# Altium PCB Sheet1.PcbDoc
Units mm, origin at the board's own origin, x right, y up, seen from the top; angles counter-clockwise.
Board outline 152.4 x 101.6 mm, 2 copper layers (Top Layer, Bottom Layer); 12 components, 9 nets, 61 pads, 0 vias.
Unrouted connection lines stored in the file: 2.
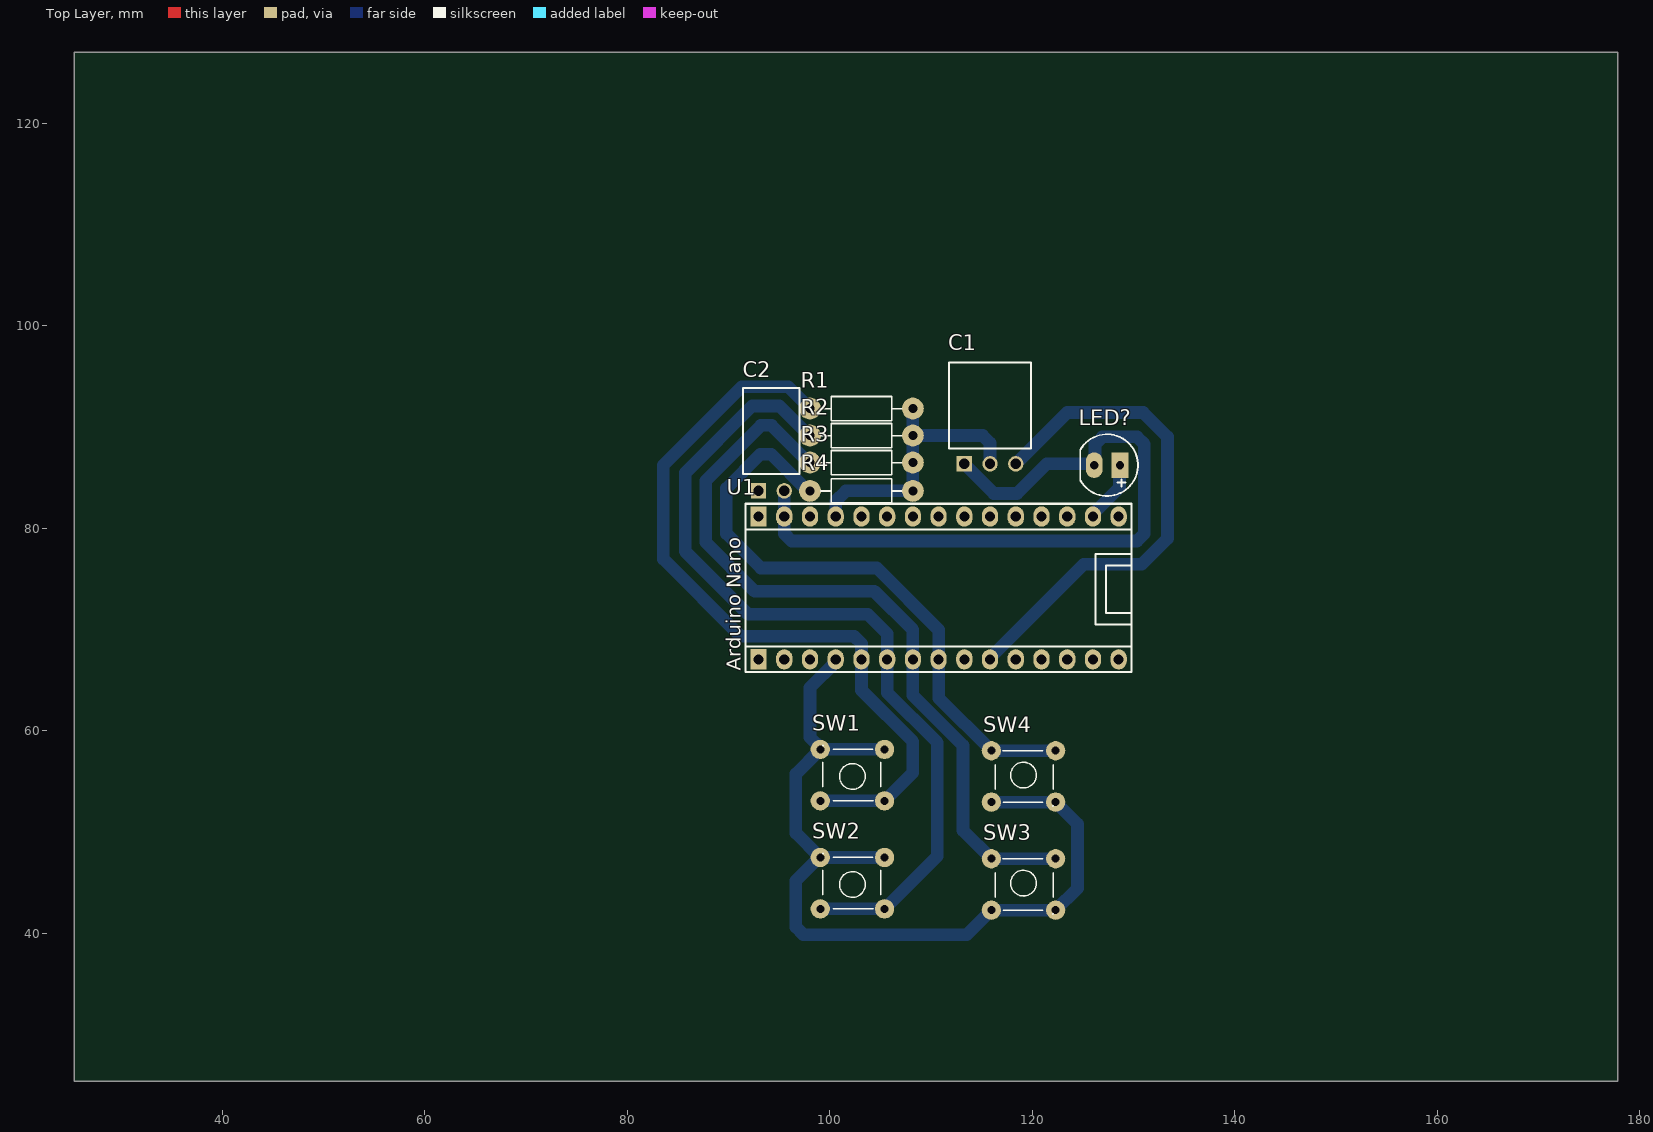
[diagram p0: Top Layer view]
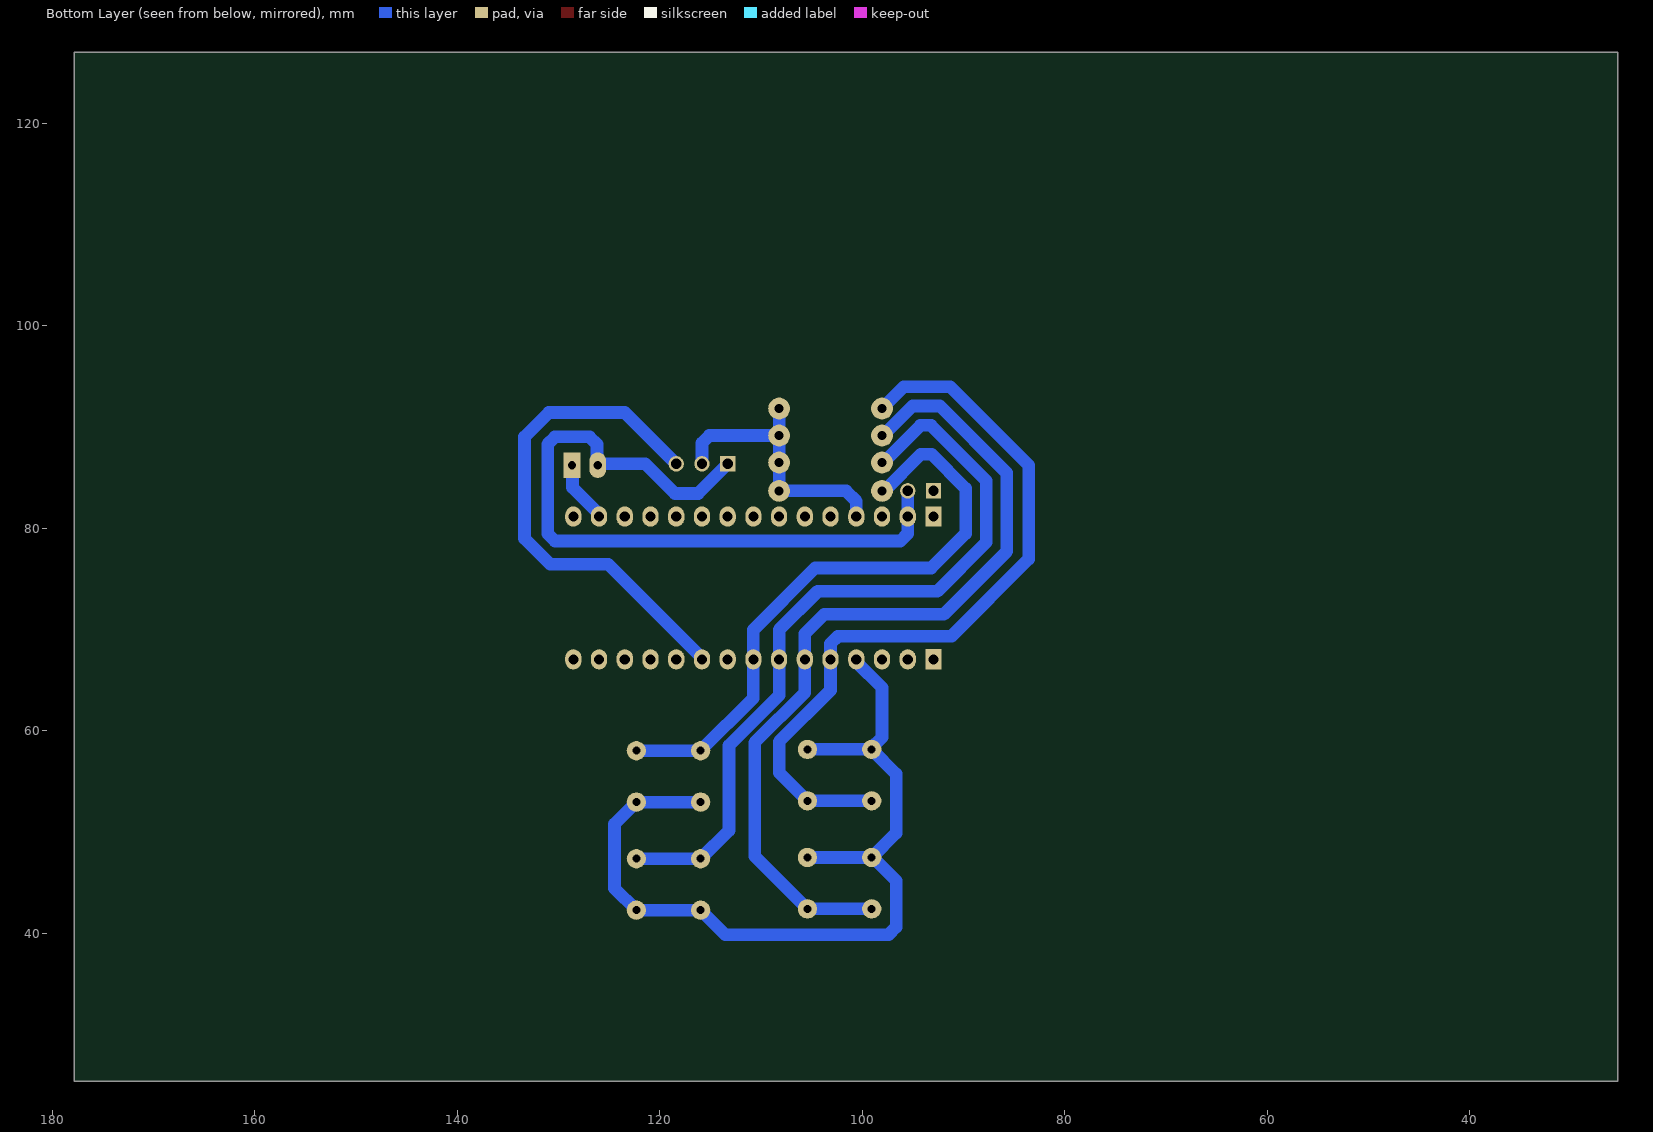
[diagram p1: Bottom Layer view, seen from below]
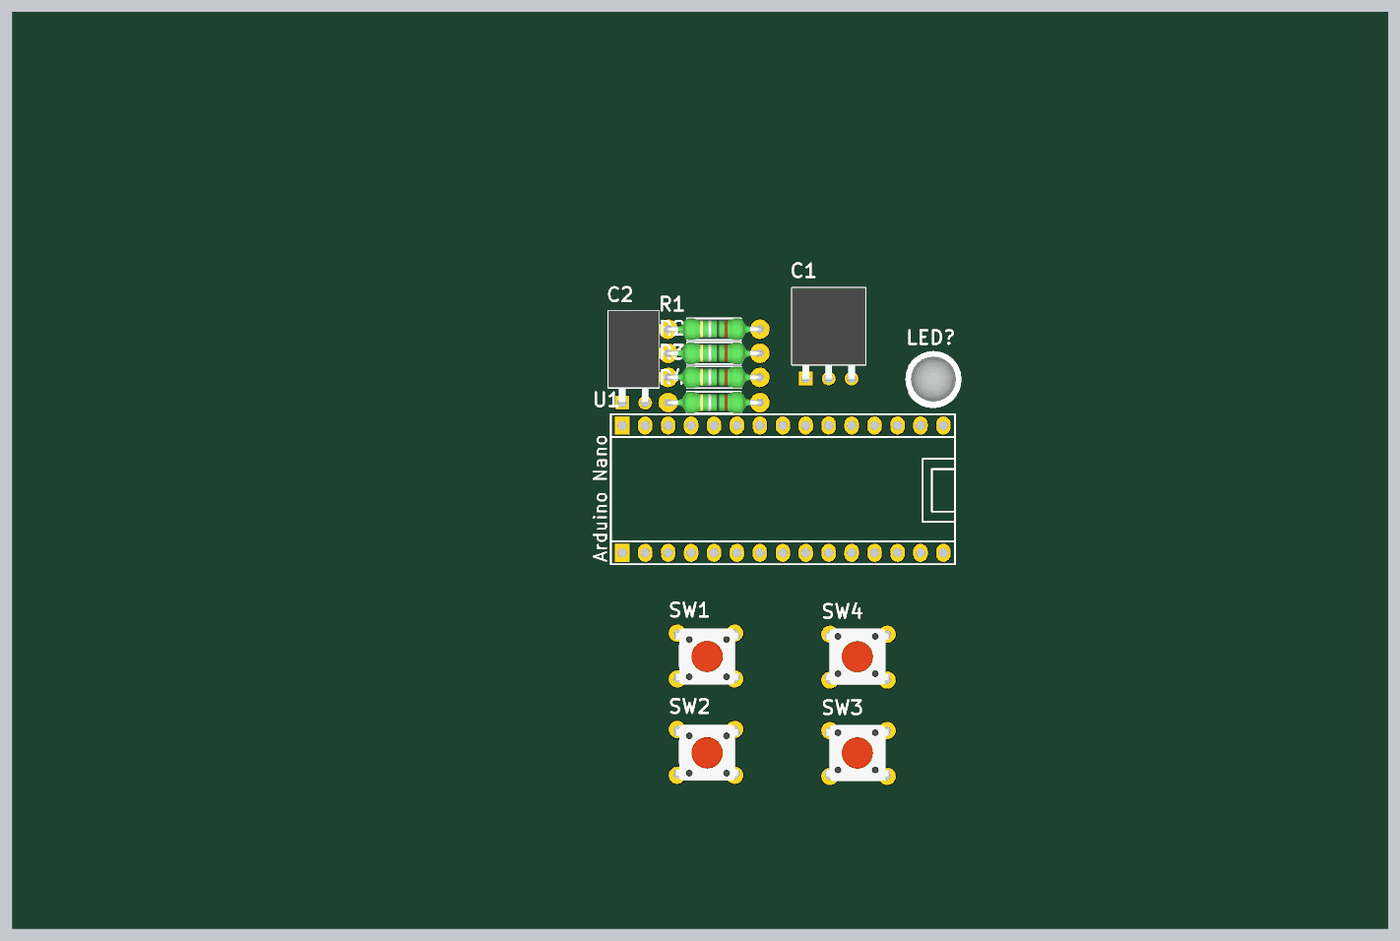
[diagram p2: 3D render of the assembled board from above, using the file's embedded part models]

## Layer stack, top to bottom
Top Solder: solder mask 0.0102, Solder Resist, Dk 3.5
Top Layer: signal copper 0.0356
Dielectric 1: dielectric 0.32, FR-4, Dk 4.8
Bottom Layer: signal copper 0.0356
Bottom Solder: solder mask 0.0102, Solder Resist, Dk 3.5

## Board outline
25.4,25.4 177.8,25.4 177.8,127 25.4,127

## Design rules (kind name [scope] priority, off if disabled: settings)
Clearance [All] p1: gap=0.254 ignorepadtopadclearanceinfootprint=FALSE except(0: Arc-Hole Track-Hole SMDPad-Hole THPad-Hole Via-Hole Fill-Hole Poly-Hole Region-Hole Text-Hole)
PolygonConnect [All] p1: connectstyle=Relief reliefconductorwidth=0.254 reliefentries=4 polygonreliefangle="90 Angle" airgapwidth=0.254
RoutingLayers [All] p1: top layer_v5=FALSE bottom layer_v5=TRUE
RoutingVias [All] p1: holewidth=0.5 width=1.25 viastyle="Through Hole" minholewidth=0.5 minwidth=1.25 maxholewidth=0.5 maxwidth=1.25
SolderMaskExpansion [All] p1: expansion=0.102 istentingtop=FALSE
Width [All] p1: maxlimit=1.75 minlimit=1 preferedwidth=1.25
29 further rules are at their usual default settings.

## Components (designator, comment, footprint, x,y, rotation, side; value= is the part's Value field where it differs from the comment)
C1 "RF 315MHz" JP3-C1C 115.824,86.36 r0 top
C2 "Battery" JP2-C1C 92.964,83.693 r0 top
LED? "LED" LED-5-WHITE 127.381,86.233 r180 top value="LED 3 ly Single Colour"
R1 "2k2" RES-1/4W 103.505,91.694 r0 top
R2 "2k2" RES-1/4W 103.505,89.027 r0 top
R3 "2k2" RES-1/4W 103.505,86.36 r0 top
R4 "2k2" RES-1/4W 103.505,83.566 r0 top
SW1 "SW" SW2-DIP 105.41,53.086 r180 top value="Button chip 4 pin"
SW2 "SW" SW2-DIP 105.41,42.418 r180 top value="Button chip 4 pin"
SW3 "SW" SW2-DIP 115.951,47.371 r0 top value="Button chip 4 pin"
SW4 "SW" SW2-DIP 115.951,58.039 r0 top value="Button chip 4 pin"
U1 "Arduino Nano" PCBComponent_1 111.76,73.914 r180 top

## Footprints (in the part's own frame and the unit in brackets; to place one, negate y for a bottom-side part, rotate by r counter-clockwise, add the part's x,y. Pads: shape width x height; smd on the part's side, far side on the other; paste and mask are expansions set on the pad)
JP2-C1C [mm] "02p 1 row Right angle"
  rect 1.52x1.52 hole 1.02: 1(0,0)
  round 1.52 hole 1.02: 2(2.54,0)
  silkscreen extent -1.52,1.65 4.06,10.17, body extent -1.52,-0.13 4.06,10.17, height 2.51
JP3-C1C [mm] "03p 1 row Right angle"
  rect 1.52x1.52 hole 1.02: 1(-2.54,0)
  round 1.52 hole 1.02: 2(0,0) 3(2.54,0)
  silkscreen extent -4.06,1.52 4.06,10.03, body extent -4.06,-0.25 4.06,10.05, height 2.51
LED-5-WHITE [mil] "LED 2 PIN, 5 ly , Only colour, pin to pin 110mil"
  rect 65x100 hole 32: 1(-50,0)
  oval 65x100 hole 32: 2(50,0)
  silkscreen extent -120,-120 104,120, body extent -124,-125 121,120, height 340
PCBComponent_1 [mm]
  rect 1.6x2 hole 1: 1(18.796,6.858) 30(18.796,-7.239)
  oval 1.6x2 hole 1: 2(16.256,6.858) 3(13.716,6.858) 4(11.176,6.858) 5(8.636,6.858) 6(6.096,6.858) 7(3.556,6.858) 8(1.016,6.858) 9(-1.524,6.858) 10(-4.064,6.858) 11(-6.604,6.858) 12(-9.144,6.858) 13(-11.684,6.858) 14(-14.224,6.858) 15(-16.764,6.858) 16(-16.764,-7.239) 17(-14.224,-7.239) 18(-11.684,-7.239) 19(-9.144,-7.239) 20(-6.604,-7.239) 21(-4.064,-7.239) 22(-1.524,-7.239) 23(1.016,-7.239) 24(3.556,-7.239) 25(6.096,-7.239) 26(8.636,-7.239) 27(11.176,-7.239) 28(13.716,-7.239) 29(16.256,-7.239)
  silkscreen extent -18.03,-8.51 20.07,8.13
RES-1/4W [mil]
  round 85 hole 35: 1(-215,5) 2(185,5)
  silkscreen extent -173,-42 141,52, body extent -227,-42 197,52, height 95
SW2-DIP [mil] "SW button 4pin, 250 x250 mil"
  round 75 hole 31: 1(0,0) 2(0,-200) 3(250,-200) 4(250,0)
  silkscreen extent 15,-215 240,0, body extent -36,-220 276,24, height 276

## Part data
C1: library part JP3, "WR-PHD 2.54 mm Angled Socket Header", Manufacturer="W¨¹rth Elektronik eiSos GmbH", partNo=613003143121, ComponentLink1 Description=Manufacturer, ComponentLink1URL=http://www.we-online.com, ComponentLink2 Description=Datasheet, ComponentLink2URL=http://katalog.we-online.de/em/datasheet/6130xx143121.pdf, Created by="Karrer Zheng", Created Date="29 March 2013", NoPins=03
C2: library part JP2, "WR-PHD 2.54 mm Angled Socket Header", Manufacturer="W¨¹rth Elektronik eiSos GmbH", partNo=613002143121, ComponentLink1 Description=Manufacturer, ComponentLink1URL=http://www.we-online.com, ComponentLink2 Description=Datasheet, ComponentLink2URL=http://katalog.we-online.de/em/datasheet/6130xx143121.pdf, Created by="Karrer Zheng", Created Date="29 March 2013", NoPins=02
LED?: "LED Single colour Green and Red"
R1 R2 R3 R4: library part Res, "Res", Manufacturer="Generic Components", Class=Passive, Published=08/06/2000, Publisher="Altium Hobart Technology Centre", SubClass=R
SW1 SW2 SW3 SW4: library part SW4, "Switch button 4 pin"
U1: library part Component_1

## Nets (pads, with @x,y where several pads share a name; then routed paths per layer and width w, separated by ;. In a path a pad name is that pad's centre, name@x,y a point inside that pad or via, vN(x,y) a via of type N, cw(c..) or ccw(c..) an arc to the next point about the centre after c; other vN are vias at no path point)
5V: C1.2 R1.2 R2.2 R3.2 R4.2 U1.27 | length 27.7
  Bottom Layer w1.25: U1.27 100.584,82.677 101.6,83.693 R4.2 R3.2 R2.2 ; R1.2 R2.2 ; C1.2 115.824,88.422 115.092,89.154 R2.2
ButtonD0: R1.1 SW1.1 SW1.4 U1.5 | length 76
  Bottom Layer w1.25: R1.1 95.885,93.98 91.313,93.98 83.566,86.233 83.566,76.962 91.186,69.342 102.392,69.342 103.124,68.61 U1.5 103.124,64.008 108.204,58.928 108.204,55.88 SW1.1 SW1.4
ButtonD1: R2.1 SW2.1 SW2.4 U1.6 | length 85.1
  Bottom Layer w1.25: R2.1 97.941,89.154 95.02,92.075 92.329,92.075 85.725,85.471 85.725,77.724 91.948,71.501 103.759,71.501 105.664,69.596 U1.6 105.664,63.786 110.617,58.833 110.617,47.625 SW2.1 SW2.4
ButtonD2: R3.1 SW3.1 SW3.4 U1.7 | length 76.4
  Bottom Layer w1.25: R3.1 97.917,86.487 94.244,90.16 93.208,90.16 87.757,84.709 87.757,78.613 92.583,73.787 104.394,73.787 108.204,69.977 U1.7 108.204,63.5 113.157,58.547 113.157,50.165 SW3.1 SW3.4
ButtonD3: R4.1 SW4.1 SW4.4 U1.8 | length 61
  Bottom Layer w1.25: R4.1 97.822,83.693 94.196,87.319 93.161,87.319 89.789,83.947 89.789,79.472 93.188,76.073 104.648,76.073 110.744,69.977 U1.8 110.744,63.246 SW4.1 SW4.4
Dout: C1.3 U1.10 | length 50.7
  Bottom Layer w1.25: U1.10 115.824,67.183 125.095,76.454 130.81,76.454 133.35,78.994 133.35,89.027 130.937,91.44 123.444,91.44 C1.3
GND: C1.1 C2.2 LED?.2 SW1.2 SW1.3 SW2.2 SW2.3 SW3.2 SW3.3 SW4.2 SW4.3 U1.4 U1.29 | length 161.5
  Bottom Layer w1.25: C2.2 U1.29 95.504,79.472 96.236,78.74 130.332,78.74 131.064,79.472 131.064,88.295 130.332,89.027 126.92,89.027 126.188,88.295 126.188,86.31 LED?.2 125.984,86.36 121.412,86.36 118.491,83.439 116.205,83.439 C1.1 ; U1.4 100.584,66.802 98.044,64.262 98.044,59.359 99.06,58.343 SW1.3 ; SW2.2 SW2.3 ; SW1.2 SW1.3 ; SW4.2 SW4.3 124.46,50.8 124.46,44.45 SW3.3 SW3.2 113.538,39.878 97.379,39.878 96.647,40.61 96.647,45.212 98.933,47.498 SW2.3 ; SW2.3 96.647,49.911 96.647,55.753 SW1.3
Led: LED?.1 U1.17 | length 6.2
  Bottom Layer w1.25: U1.17 125.984,81.407 128.607,84.03 128.607,86.189 LED?.1
Vin: C2.1 U1.30
pads on no net: U1.1 U1.2 U1.3 U1.9 U1.11 U1.12 U1.13 U1.14 U1.15 U1.16 U1.18 U1.19 U1.20 U1.21 U1.22 U1.23 U1.24 U1.25 U1.26 U1.28